# EAGLE board TeamI_PDSlayout (EAGLE 9.6.0)
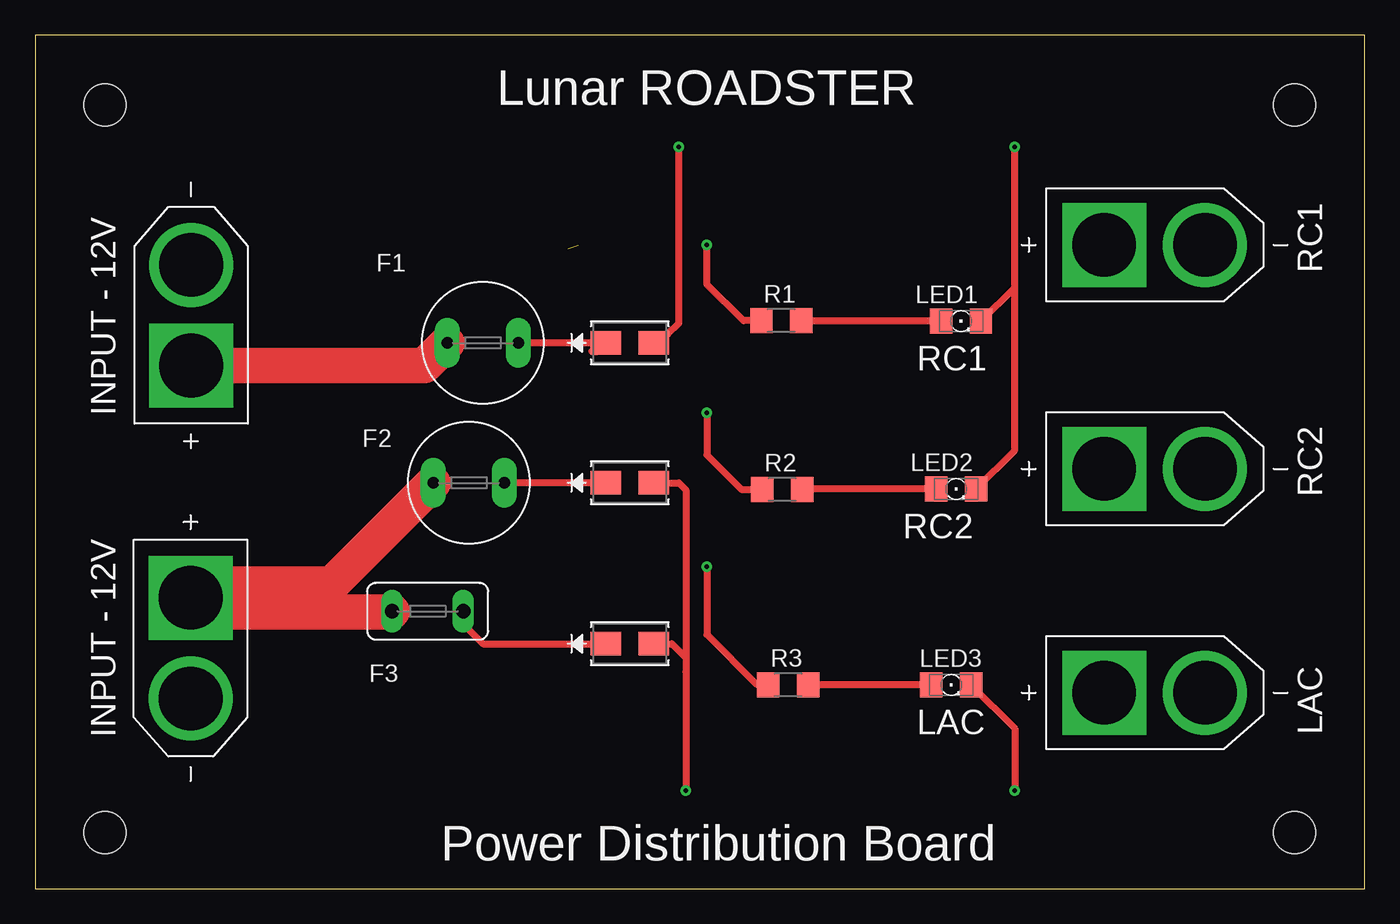
[diagram p0: board, top side]
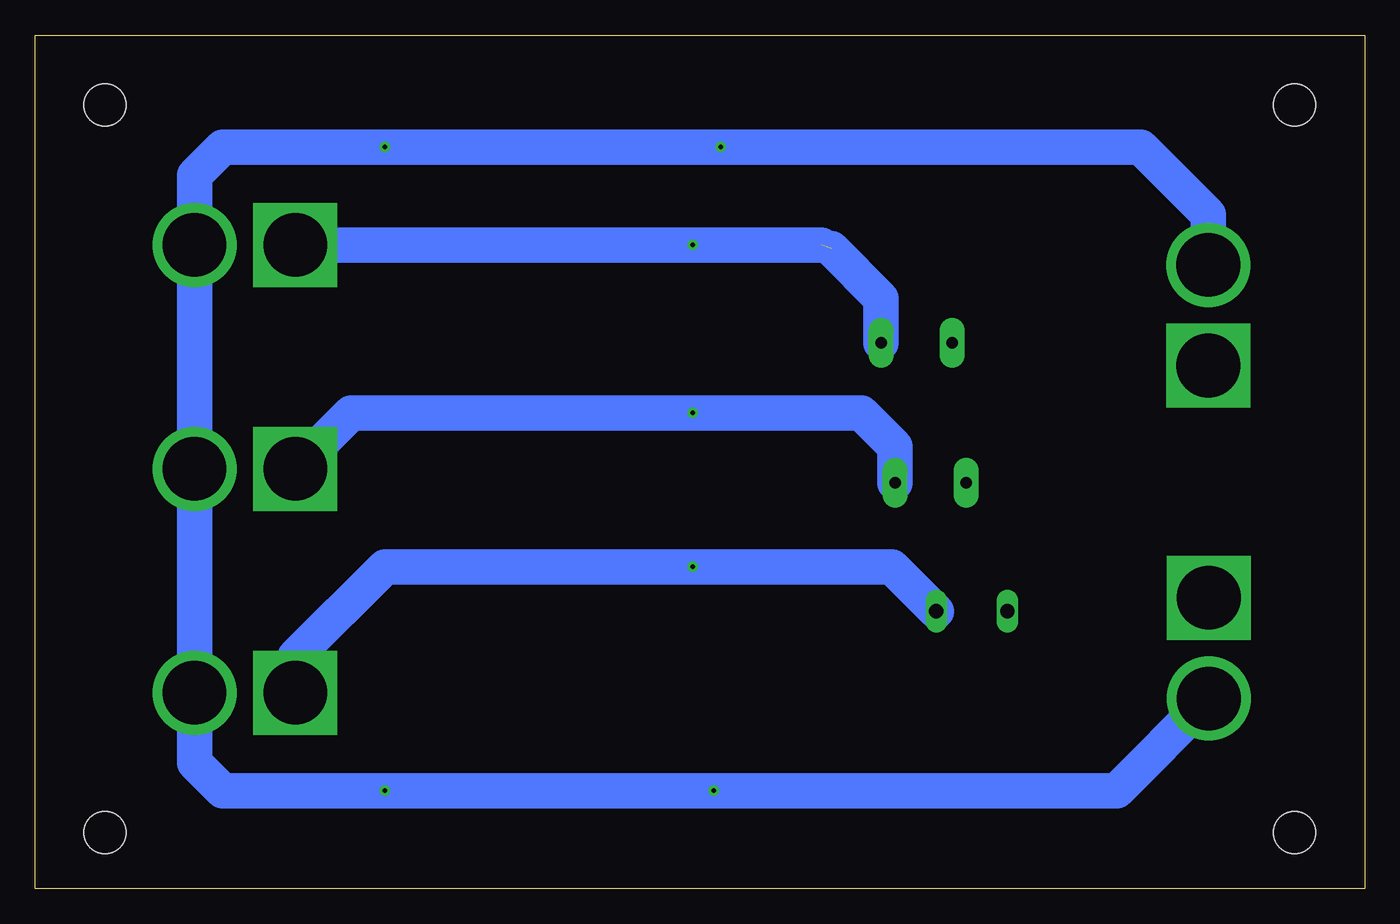
[diagram p1: board, bottom side, seen from below]

Size 95 x 61 mm. Coordinates in mm from the lower left corner, seen from the top.
Outline: 0,0 95,0 95,61 0,61 0,0
Copper layers (1*16): Top 0.035mm / dielectric 1.5mm / Bottom 0.035mm
Design rules "default *": minimum track width 20mil, minimum drill 0.35mm, track to track 6mil, track to pad 6mil, pad to pad 6mil, via to via 6mil, smd to smd 6mil, copper to edge 40mil, drill to drill 6mil, minimum pad ring 10mil, minimum via ring 8mil, stop-mask expansion 4mil, vias tented up to drill 0mil, thermal gap 10mil
Holes 3 mm at 5,56 5,4 90,4 90,56

## Footprints (pad centres in the part's own frame; a part is rotated, then mirrored left to right if it is on the bottom)
P4SMASERIES_LTF = smd 2.184 x 1.651: 1 -1.702,0; 2 1.702,0
TR5 = drill 0.813 pad 1.778 long: 1 -2.54,0; 2 2.54,0
TE5 = drill 1.016 long: 1 -2.54,0; 2 2.54,0
AMASS_XT60-M = drill 4.55 pad 6: N 3.6,0 | drill 4.55 pad 6 square: P -3.6,0
1206 = smd 1.6 x 1.803: A -1.422,0; C 1.422,0
R1206 = smd 1.6 x 1.803: 1 -1.422,0; 2 1.422,0

## Placement (x,y rotation side)
CR1  P4SMA16A  [P4SMASERIES_LTF]  42.5,39 0 top
CR2  P4SMA16A  [P4SMASERIES_LTF]  42.5,29 0 top
CR3  P4SMA16A  [P4SMASERIES_LTF]  42.5,17.5 0 top
F1  10A  [TR5]  32,39 0 top
F2  10A  [TR5]  31,29 0 top
F3  5A  [TE5]  28.06,19.82 0 top
J1  XT60-M  [AMASS_XT60-M]  11.16,40.97 90 top
J2  XT60-M  [AMASS_XT60-M]  80,46 0 top
J3  XT60-M  [AMASS_XT60-M]  80,30 0 top
J4  XT60-M  [AMASS_XT60-M]  80,14 0 top
J5  XT60-M  [AMASS_XT60-M]  11.12,17.18 270 top
LED1  RC1  [1206]  66.17,40.55 0 top
LED2  RC2  [1206]  65.82,28.55 0 top
LED3  LAC  [1206]  65.47,14.55 0 top
R1  470  [R1206]  53.33,40.59 0 top
R2  470  [R1206]  53.39,28.52 0 top
R3  470  [R1206]  53.82,14.56 0 top

## Library data of the parts
CR1-CR3 = P4SMA16A; COPYRIGHT: Copyright (C) 2025 Ultra Librarian. All rights reserved.; MANUFACTURER_PART_NUMBER: P4SMA16A; MFR_NAME: Littelfuse Inc
F1-F3 = fuse; OC_FARNELL: unknown; OC_NEWARK: unknown
J1-J5 = XT60-M; AVAILABILITY: Not in stock; CHECK_PRICES: https://www.snapeda.com/parts/XT60-M/AMASS/view-part/?ref=eda; DESCRIPTION: Plug; DC supply; XT60; male; PIN: 2; for cable; soldered; 30A; 500V; MF: AMASS; MP: XT60-M; PACKAGE: Package; PRICE: None; SNAPEDA_LINK: https://www.snapeda.com/parts/XT60-M/AMASS/view-part/?ref=snap
LED1-LED3 = led
R1-R3 = rcl; SPICEPREFIX: R

## Nets
GND: CR1.2 CR2.2 CR3.2 J1.N J2.N J3.N J4.N J5.N LED1.C LED2.C LED3.C
N$1: CR1.1 F1.2 J2.P R1.1
N$3: CR3.1 F3.2 J4.P R3.1
N$4: LED1.A R1.2
N$5: F1.1 J1.P
N$6: CR2.1 F2.2 J3.P R2.1
N$7: LED2.A R2.2
N$9: LED3.A R3.2
N$14: F2.1 F3.1 J5.P

## Tracks (layer width: path | path; a pad name or v marks a point on that pad's centre or on a via)
GND  (via drill 0.35)
  Top 0.508: LED1.C 70,42.96 | 70,42.96 v70,53 | LED2.C 70,31.31 70,42.96 | LED3.C 70,11.44 v70,7 | CR1.2 44.81,39.61 45.2,39.61 46,40.41 v46,53 | CR3.2 45.5,17.5 46.5,16.5 | 46.5,16.5 46.5,15.5 v46.5,7 | CR2.2 46,29 46.5,28.5 46.5,16.5
  Bottom 2.54: J1.N 11.16,48.16 16,53 v46,53 v70,53 81.6,53 83.6,51 J2.N J3.N J4.N 83.6,9 81.6,7 v70,7 v46.5,7 17.7,7 J5.N
N$1  (via drill 0.35)  (1 unrouted)
  Top 0.508: R1.1 50.63,40.59 48,43.21 v48,46 | v48,46 | 39.8,38.39 40.19,38.39 CR1.1 F1.2
  Bottom 2.54: 38.81,46 v48,46 J2.P | F1.2 34.54,42.16 38.1,45.72
N$3  (via drill 0.35)
  Top 0.508: v48,23 48,18.16 51.6,14.56 R3.1 | F3.2 30.6,18.9 32,17.5 CR3.1
  Bottom 2.54: F3.2 33.78,23 v48,23 70,23 76.4,16.6 J4.P
N$4
  Top 0.508: R1.2 54.79,40.55 LED1.A
N$5
  Top 2.54: F1.1 27.83,37.37 J1.P
N$6  (via drill 0.35)
  Top 0.508: v48,34 48,31 50.48,28.52 R2.1 | 40.62,28.82 CR2.1 F2.2
  Bottom 2.54: J3.P 72.4,34 v48,34 35.94,34 33.54,31.6 F2.2
N$7
  Top 0.508: LED2.A 54.84,28.55 R2.2
N$9
  Top 0.508: R3.2 LED3.A
N$14
  Top 0.508: 24.48,25.02
  Top 2.54: F3.1 25.48,19.78 12.12,19.78 J5.P 12.12,21.78 16.64,21.78 21.24,21.78 24.48,25.02 F2.1

## Text on the board
tNames: Lunar ROADSTER | INPUT - 12V | RC1 | RC1 | RC2 | INPUT - 12V | RC2 | LAC | LAC | Power Distribution Board